# Altium PCB PCB1.PcbDoc (part 2 of 3)
Units mil, origin at the board's own origin, x right, y up, seen from the top; angles counter-clockwise.
Board outline 3937.01 x 3937.01 mil, 4 copper layers (L1, L2, L3, L4), stack 61.822 mil thick; 181 components, 235 nets, 1103 pads, 422 vias.
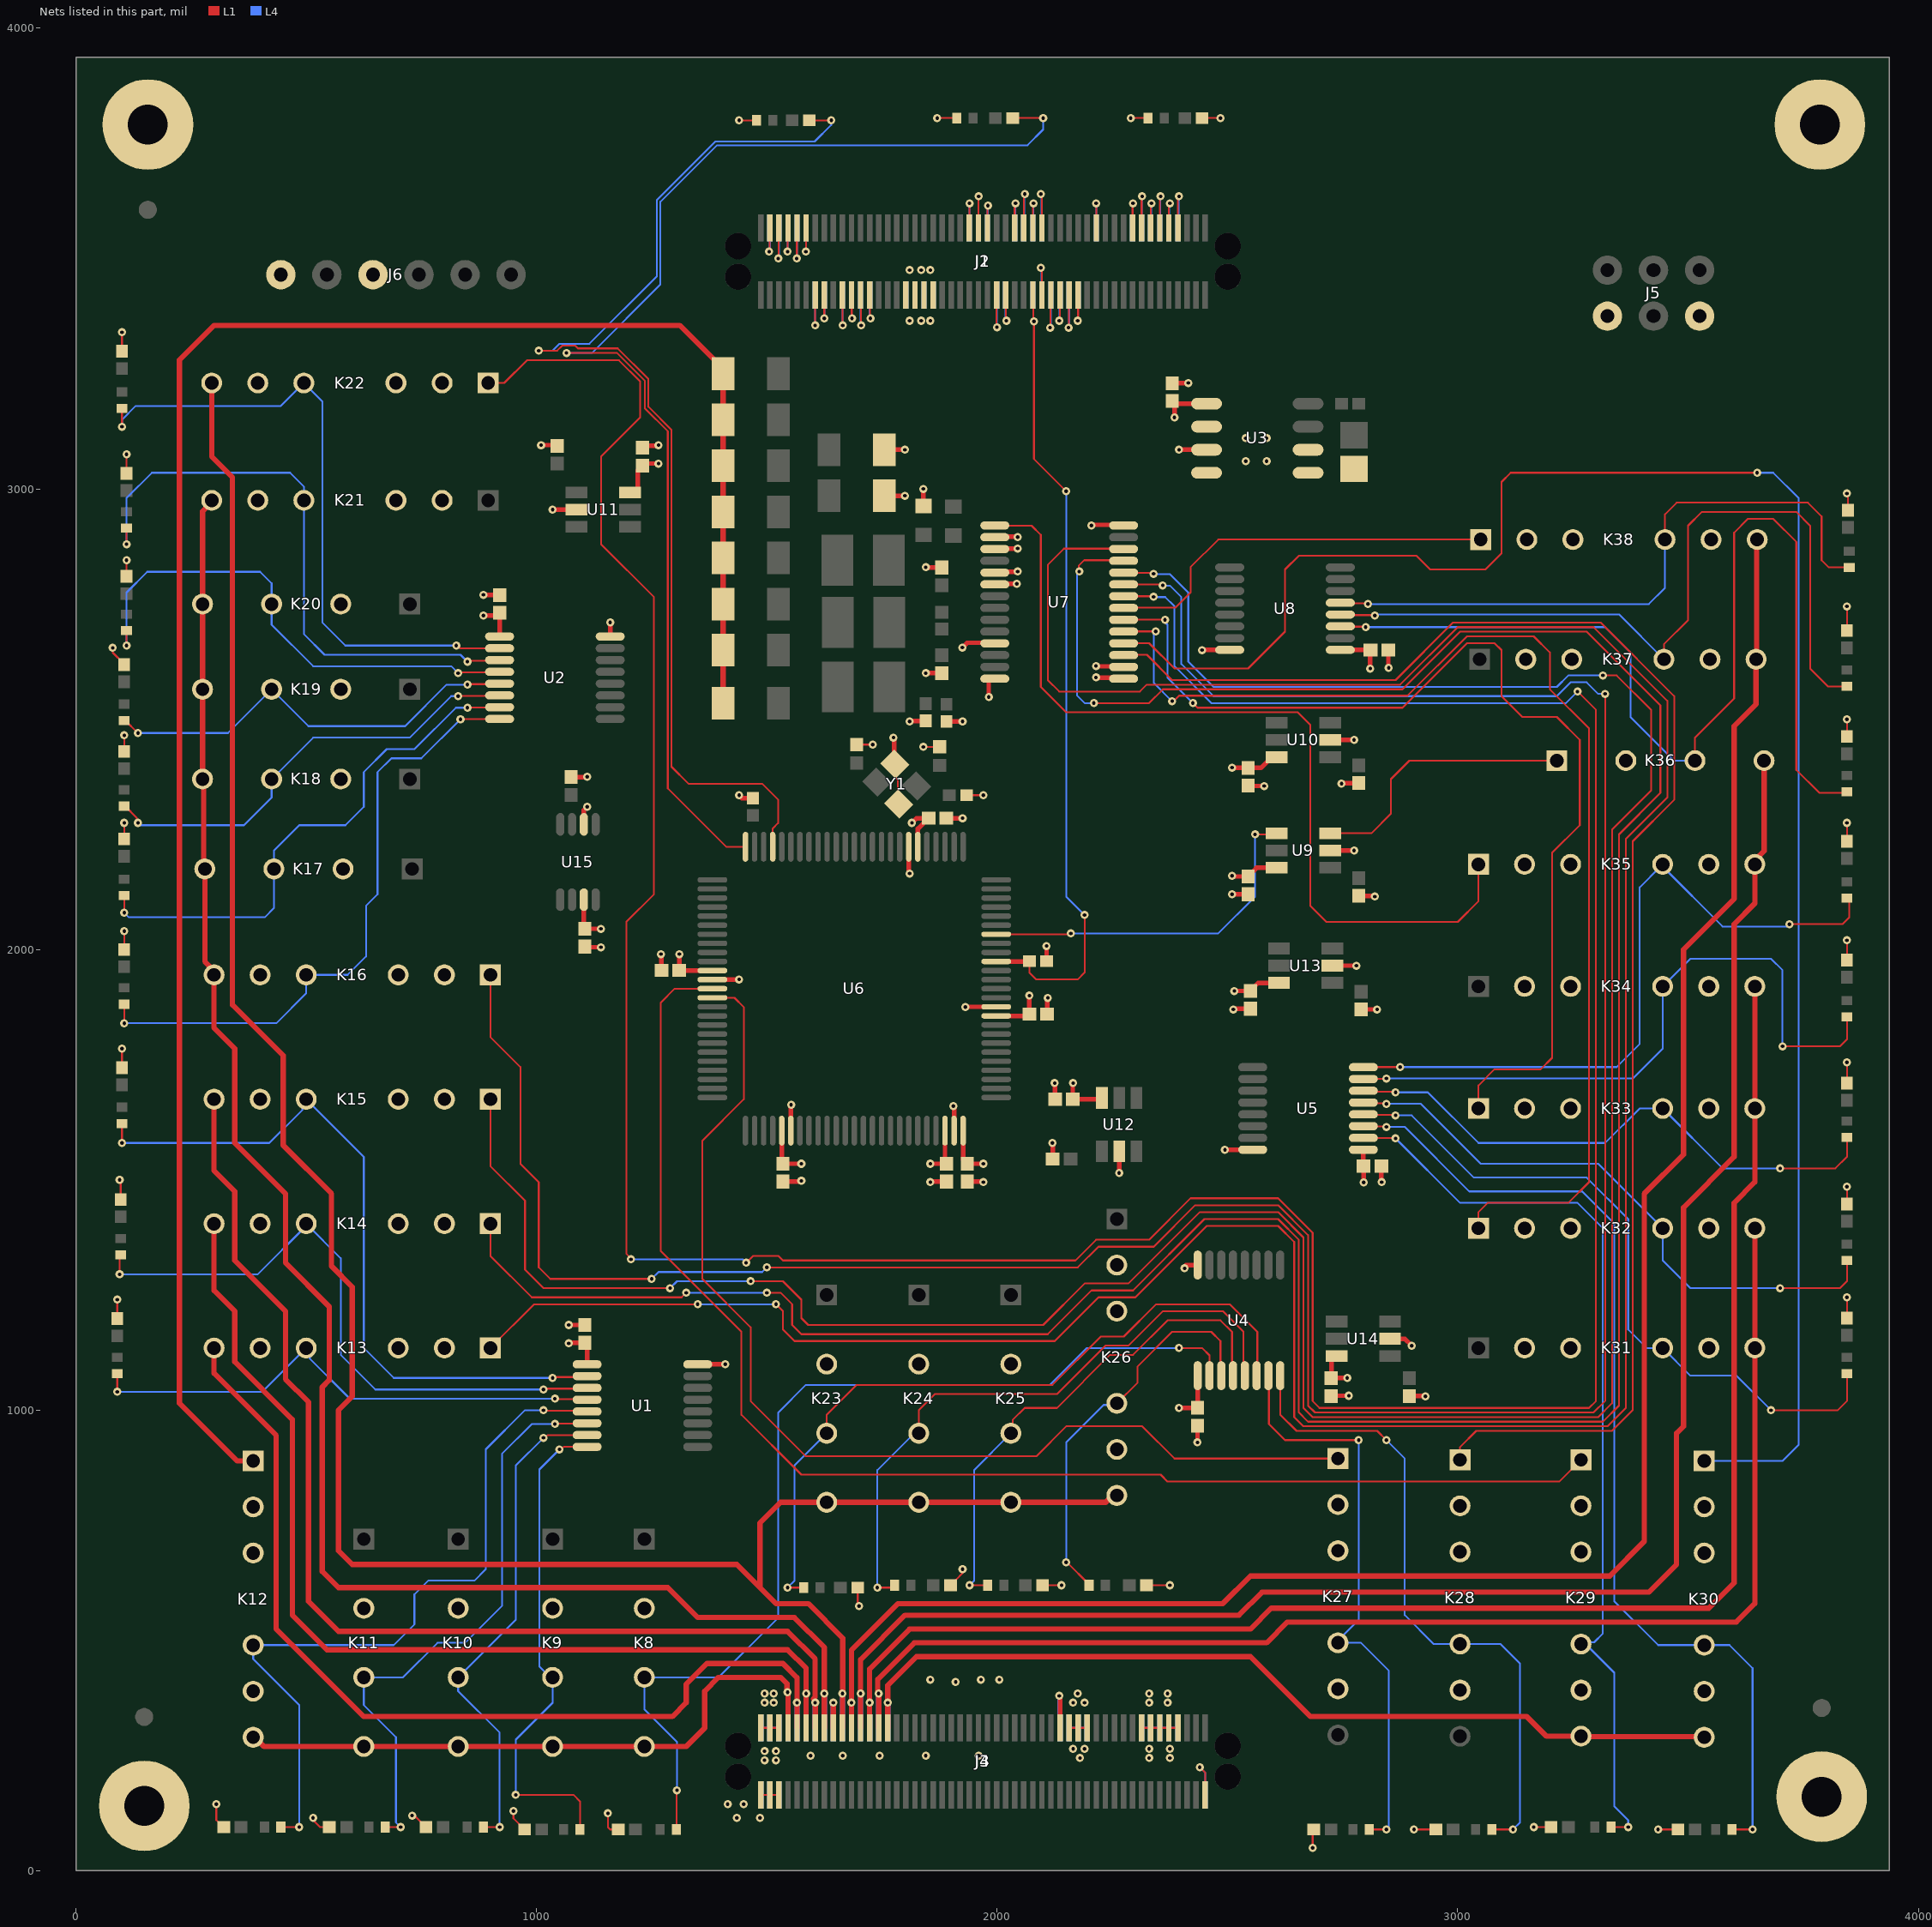
[diagram p4: the nets of this part, all layers, seen from the top]

## Via types
v1: diameter 17.72, hole 7.87, L1 to L4, 422 vias

## Nets (pads, with @x,y where several pads share a name; then routed paths per layer and width w, separated by ;. In a path a pad name is that pad's centre, name@x,y a point inside that pad or via, vN(x,y) a via of type N, cw(c..) or ccw(c..) an arc to the next point about the centre after c; other vN are vias at no path point) (continued)
+5V: C1.2 C2.2 C3.2 C4.2 C5.2 C6.2 C7.2 C8.2 C9.2 C11.2 C12.2 C13.2 C17.2 C18.2 C21.2 C22.2 C27.2 C28.2 C31.2 J3.1 J3.3 J3.5 J4.2 J4.4 J4.6 J5.2 J6.1 K8.2 K9.2 K10.2 K11.2 K12.2 K13.2 K14.2 K15.2 K16.2 K17.2 K18.2 K19.2 K20.2 K21.2 K22.2 K23.2 K24.2 K25.2 K26.2 K27.2 K28.2 K29.2 K30.2 K31.2 K32.2 K33.2 K34.2 K35.2 K36.2 K37.2 K38.2 R2.2 R9.1 R10.1 R11.1 R12.1 R13.1 R14.1 R15.1 R16.1 R17.1 R18.1 R19.1 R20.1 R21.1 R22.1 R23.1 R24.1 R25.1 R26.1 R27.1 R28.1 R29.1 R30.1 R31.1 R32.1 R33.1 R34.1 R35.1 R36.1 R37.1 R38.1 R39.1 R40.2 R49.1 U1.9 U2.9 U3.1 U3.3 U4.9 U5.9 U6.10 U6.31 U6.61 U6.80 U6.98 U6.100 U8.9 U9.6 U10.6 U11.6 U12.6 U13.6 U14.6 U15.7 | length 3536
  L1 w4: v1(80,2655) 80,2644.69 105,2619.69 R33.1@105,2618.7 ; R26.1@90,1198.7 v1(90,1240) ; v1(95,1500) 97.32,1497.68 R21.1@97.32,1457.4 ; R36.1@100,1743.7 v1(100,1785) ; R27.1@100,3298.7 v1(100,3340) ; R32.1@105,2000 v1(105,2040) ; R28.1@105,2240 v1(105,2275) ; R34.1@105,2430 v1(105,2465) ; R49.1@110,2810 v1(110,2845) ; R10.1@110,3033.7 v1(110,3075) ; v1(305,145) 305,110.31 320.31,95 R31.1@321.3,95 ; v1(515,115) 515,110 530,95 R17.1@550.31,95 ; v1(730,120) 735,120 R16.1@760,95 ; C2.2@914.29,2725 919.92,2730.63 C2.2@920,2730.71 ; v1(950,130) 950,114.02 962.24,101.78 962.24,100.8 973.03,90 R23.1@974.01,90 ; v1(1070,1145) v1@1071.42,1146.42 ; C31.2@1102.8,2047.2 C31.2@1105,2045 ; v1(1155,125) 1155,95 1160,90 R24.1@1177.6,90 ; C5.2@1310,1955 C5.2@1310.63,1954.37 ; J3.1@1486.97,310.51 J3.3@1506.65,310.51 J3.5@1526.34,310.51 ; C4.2@1532.52,1537.48 C4.2@1535,1535 ; R38.1@1697.4,615 1697.4,582.6 1700,580 v1(1700,575) ; C9.2@1850.63,2285 C9.2@1851.42,2285 ; C6.2@1886.85,1538.15 C6.2@1890,1535 ; R39.1@1898.7,620 1899.69,620 1910.48,630.8 1910.48,631.78 1925,646.3 v1(1925,655) ; C7.2@1926.22,1543.78 C7.2@1935,1535 ; R2.2@1933.7,2335 v1(1970,2335) ; C8.2@2065.94,1855.94 C8.2@2070,1860 ; R29.1@2098.7,620 v1(2140,620) ; v1@2164.29,1709.29 v1(2165,1710) ; U12.6@2224.53,1675 U12.6@2227.6,1678.07 ; R13.1@2324.57,620 v1(2375,620) ; C3.2@2380,3190.71 2385,3185.71 C3.2@2385.71,3185 ; C11.2@2435,1005 C11.2@2435.43,1005.43 ; R9.1@2445,3805 v1(2485,3805) ; v1(2510,2160) v1@2511.42,2158.58 ; v1(2510,2395) v1@2510.71,2394.29 ; C27.2@2545,2158.58 C27.2@2545,2159.37 ; C18.2@2550,1910 C18.2@2550,1910.79 ; U10.6@2596.1,2417.6 U10.6@2606.93,2417.6 ; v1(2685,50) 2685,87.4 R19.1@2687.6,90 ; U14.6@2726.1,1117.6 U14.6@2736.93,1117.6 ; C12.2@2795.08,1530.63 C12.2@2795.71,1530 ; C13.2@2810,2649.29 C13.2@2810.71,2650 C13.2@2810.28,2650.43 ; v1(2905,90) R18.1@2952.6,90 ; v1(3165,95) R22.1@3202.6,95 ; v1(3435,90) R25.1@3478.03,90 ; R15.1@3845,1200 v1(3845,1245) ; R30.1@3845,1447.4 v1(3845,1485) ; R35.1@3845,1710 v1(3845,1755) ; R12.1@3845,1977.4 v1(3845,2020) ; R37.1@3845,2235 v1(3845,2275) ; R14.1@3845,2462.4 v1(3845,2500) ; R11.1@3845,2692.4 v1(3845,2745) ; v1(3845,2990) 3847.32,2987.68 R20.1@3847.32,2953.7
  L1 w10: v1(885,2725) C2.2@914.29,2725 ; U2.9@919.92,2679.57 C2.2@919.92,2730.63 ; v1@1071.42,1146.42 C1.2@1105,1146.42 1110,1141.42 1110,1099.65 U1.9@1109.92,1099.57 ; C31.2@1102.8,2047.2 U15.7@1102.8,2108.31 ; C31.2@1105,2045 v1(1140,2045) ; U11.6@1203.07,2992.4 1211.87,2992.4 1219.66,3000.2 1219.66,3039.89 1225.52,3045.75 1230.83,3045.75 1240,3054.92 C21.2@1240,3055.71 ; 1245,3055 v1(1265,3055) ; C5.2@1310,1955 v1(1310,1990) ; C5.2@1310.63,1954.37 U6.61@1381.93,1954.37 ; C4.2@1532.52,1537.48 U6.80@1532.52,1606.93 ; C4.2@1535,1535 v1(1575,1535) ; v1(1815,2275) 1825,2285 1850.63,2285 1827.8,2262.17 U6.31@1827.8,2223.07 ; v1(1855,1535) C6.2@1890,1535 ; C6.2@1886.85,1538.15 U6.98@1886.85,1606.93 ; R40.2@1890,2495 v1(1925,2495) ; C7.2@1926.22,1543.78 U6.100@1926.22,1606.93 ; C7.2@1935,1535 v1(1970,1535) ; U6.10@1998.07,1855.94 C8.2@2065.94,1855.94 ; C8.2@2070,1860 v1(2070,1900) ; v1@2164.29,1709.29 C22.2@2164.29,1675 U12.6@2224.53,1675 ; v1(2385,3155) C3.2@2385,3185.71 ; C3.2@2385.71,3185 U3.1@2454.76,3185 ; v1(2395,1005) C11.2@2435,1005 ; v1(2395,3085) U3.3@2454.76,3085 ; C11.2@2435.43,1005.43 U4.9@2435.43,1074.92 ; v1@2510.71,2394.29 C28.2@2545,2394.29 2572.8,2394.29 U10.6@2596.1,2417.6 ; v1@2511.42,2158.58 C27.2@2545,2158.58 ; v1(2515,1910) C18.2@2550,1910 ; C27.2@2545,2159.37 2563.23,2177.6 U9.6@2606.93,2177.6 ; C18.2@2550,1910.79 2566.81,1927.6 U13.6@2611.93,1927.6 ; U14.6@2726.1,1117.6 2726.1,1071.1 2725,1070 v1(2760,1070) ; U8.9@2745.08,2650.43 C13.2@2810.28,2650.43 ; C12.2@2795.08,1530.63 U5.9@2795.08,1565.43 ; v1(2795.71,1494.29) C12.2@2795.71,1530 ; v1(2810,2610) C13.2@2810,2649.29
  L4 w4: J4.2@1486.97,310.51 J4.4@1506.65,310.51 J4.6@1526.34,310.51
  other v1: 1495,240 1520,240 1495,260 1520,260 1495,365 1515,365 1495,385 1515,385
+5V_EN: J1.62 J2.61 R6.2 U6.16 | length 1805.1
  L1 w4: R6.2@2069.06,1974.06 R6.2@2070,1975 2070,1950 2085,1935 2175,1935 2190,1950 v1(2190,2075) ; J1.62@2077.52,3420.75 2078.76,3419.51 2078.76,3364.95 v1(2080,3363.71) 2080,3065 v1(2150,2995)
  L1 w10: U6.16@1998.07,1974.06 R6.2@2069.06,1974.06
  L4 w4: J2.61@2077.52,3420.75 2078.76,3419.51 2078.76,3364.95 v1(2080,3363.71) ; v1(2150,2995) 2150,2115 v1(2190,2075)
A: J3.7 J4.8 K8.4 K9.4 K10.4 K11.4 K12.4 | length 1456.3
  L1 w11.55: K12.4@385,290 388.63,290 408.63,270 K10.4@830,270 K9.4@1035,270 K8.4@1234.02,270 1325,270 1365,310 1365,390 1395,420 1530,420 1543.82,406.18 1543.82,389.13 1546.02,386.93 J3.7@1546.02,310.51
  L4 w11.55: v1(1545,387.95) 1545.89,387.06 1545.89,310.64 J4.8@1546.02,310.51
A1: K12.1 R41.2 R42.2 R43.2 R44.2 R45.2 R46.2 R47.2 R48.2 | length 4452.7
  L1 w4: R44.2@1405,2850 R44.2@1405,2850 R44.2@1405,2850 ; R46.2@1405,3050 R46.2@1405,3050 ; R47.2@1404.96,3150 R47.2@1404.96,3150 ; R48.2@1404.96,3250 R48.2@1404.96,3260.83
  L1 w11.55: K12.1@385,890 350,890 225,1015 225,3280 300,3355 1310.79,3355 R48.2@1404.96,3260.83 ; R41.2@1404.96,2535 R42.2@1404.96,2650 R43.2@1404.96,2750 R44.2@1405,2850 ; R44.2@1405,2850 R45.2@1404.96,2950 R46.2@1405,3050 ; R47.2@1404.96,3150 R48.2@1404.96,3250 ; R46.2@1405,3050 R47.2@1404.96,3150
ADDR: J1.56 J2.55 | length 112.8
  L1 w4: J1.56@2018.46,3420.75 2019.23,3419.98 2019.23,3365.77 v1(2020,3365)
  L4 w4: J2.55@2018.46,3420.75 2018.46,3366.54 v1(2020,3365)
ALARM: R7.1 U6.47 | length 2497.9
  L1 w4: v1(1005,3300) 1045,3300 1055.86,3310.86 1084.14,3310.86 1090,3305 1176.31,3305 1243,3238.31 1243,3178.31 1293,3128.31 1293,2397 1330,2360 1490,2360 1524.52,2325.48 1524.52,2274.52 1512.83,2262.83 U6.47@1512.83,2223.07 ; R7.1@1590,3800 R7.1@1592.4,3800 v1(1640,3800)
  L4 w4: v1(1005,3300) 1035,3300 1050,3315 1115,3315 1261,3461 1261,3626.51 1388.49,3754 1604,3754 1640,3790 v1(1640,3800)
ALERT: J1.54 J2.53 | length 140.4
  L1 w4: J1.54@1998.78,3420.75 1998.78,3351.62 v1(1999.54,3350.86)
  L4 w4: J2.53@1998.78,3420.75 1999.16,3420.37 1999.16,3351.24 v1(1999.54,3350.86)
B: J3.9 J4.10 K13.4 | length 2171.9
  L1 w11.55: K13.4@300,1135 300,1080 435,945 435,525 ; 470,490 435,525 ; J3.9@1565.71,310.51 1565.71,364.29 1565.66,364.34 v1(1565.66,365) 1565.66,419.34 1535,450 1370,450 1325,405 1325,365 1295,335 625,335 435,525
  L4 w11.55: J4.10@1565.71,310.51 v1(1565.66,365)
C: J3.11 J4.12 K14.4 | length 2287.2
  L1 w11.55: K14.4@300,1405 300,1260 345,1215 345,1105 470,980 470,555 545,480 1545,480 1585.29,439.71 v1(1585.29,385) 1585.39,384.9 J3.11@1585.39,310.51
  L4 w11.55: v1(1585.29,385) 1585.29,310.62 J4.12@1585.39,310.51
CLK_IN: K35.1 U7.15 | length 1938.2
  L1 w4: U7.15@1985,2920 2075,2920 2095,2900 2095,2570 2150,2515 2652.66,2515 2680,2487.66 2680,2095 2715,2060 3000,2060 3045,2105 K35.1@3045,2185
COIL8: D18.1 K8.3 U4.10 | length 2194.4
  L1 w4: D18.1@1303.92,90 1303.92,173.92 v1(1305,175) ; v1(2395,1135) 2445,1135 2461.02,1118.98 U4.10@2461.02,1074.92
  L4 w4: v1(1305,175) 1305,280 1234.02,350.99 K8.3@1234.02,420 1395,420 1525,550 1525,995 1585,1055 2115,1055 2195,1135 v1(2395,1135)
COIL9: D17.1 K9.3 U1.16 | length 1084.8
  L1 w4: v1(955,165) 1080,165 1095,150 1095,90.98 D17.1@1094.02,90 ; v1(1050,915) 1053.71,915 1059.14,920.43 U1.16@1109.92,920.43
  L4 w4: v1(955,165) 955,285 1035,365 K9.3@1035,420 1030,420 1006.36,443.64 1006.36,871.36 v1(1050,915)
COIL10: D10.1 K10.3 U1.15 | length 1097.2
  L1 w4: D10.1@885.02,95 v1(920,95) ; v1(1015,940) 1018.71,940 1024.74,946.02 U1.15@1109.92,946.02
  L4 w4: v1(920,95) 920,300 830,390 K10.3@830,420 840,420 840,430 955,545 955,880 v1(1015,940)
COIL11: D11.1 K11.3 U1.14 | length 1298.2
  L1 w4: D11.1@671.63,95 v1(705,95) ; v1(1040,970) 1040.81,970.81 1109.11,970.81 U1.14@1109.92,971.61
  L4 w4: v1(705,95) 695,105 695,290 625,360 K11.3@625,420 710,420 785,495 845,495 925,575 925,905 990,970 v1(1040,970)
COIL12: D25.1 K12.3 U1.13 | length 1604.1
  L1 w4: D25.1@445,95 v1(485,95) ; v1(1015,1000) 1016.4,998.6 1108.52,998.6 U1.13@1109.92,997.2
  L4 w4: v1(485,95) 485,360 385,460 K12.3@385,490 690,490 735,535 735,600 765,630 865,630 890,655 890,915 975,1000 v1(1015,1000)
COIL13: D20.1 K13.3 U1.12 | length 1154.1
  L1 w4: v1(90,1040) D20.1@90,1079.57 ; v1(1040,1025) 1041.1,1023.9 1108.82,1023.9 U1.12@1109.92,1022.8
  L4 w4: v1(90,1040) 405,1040 K13.3@500,1135 507.9,1127.1 507.9,1112.1 595,1025 v1(1040,1025)
COIL14: D15.1 K14.3 U1.11 | length 1380.3
  L1 w4: v1(95,1295) 95,1335.06 D15.1@97.32,1337.38 ; v1(1015,1045) 1016.69,1046.69 1108.23,1046.69 U1.11@1109.92,1048.39
  L4 w4: v1(95,1295) 395,1295 500,1400 K14.3@500,1405 575,1330 575,1120 650,1045 v1(1015,1045)
COIL15: D30.1 K15.3 U1.10 | length 1595.8
  L1 w4: v1(100,1580) D30.1@100,1622.38 ; v1(1035,1070) 1036.99,1071.99 1107.93,1071.99 U1.10@1109.92,1073.98
  L4 w4: v1(100,1580) 420,1580 492.1,1652.1 492.1,1667.1 K15.3@500,1675 625,1550 625,1135 690,1070 v1(1035,1070)
COIL16: D26.1 K16.3 U2.16 | length 1372.9
  L1 w4: v1(105,1840) D26.1@105,1881.3 ; v1(835,2500) 835.22,2500.22 919.7,2500.22 U2.16@919.92,2500.43
  L4 w4: v1(105,1840) 435,1840 500,1905 K16.3@500,1945 590,1945 630,1985 630,2095 655,2120 655,2385 685,2415 750,2415 v1(835,2500)
COIL17: D22.1 K17.3 U2.15 | length 1162.5
  L1 w4: v1(105,2080) D22.1@105,2117.38 ; v1(850,2525) 850.51,2525.51 919.41,2525.51 U2.15@919.92,2526.02
  L4 w4: v1(105,2080) 115,2070 410,2070 430,2090 K17.3@430,2175 430,2215 485,2270 585,2270 625,2310 625,2385 675,2435 735,2435 825,2525 v1(850,2525)
COIL18: D28.1 K18.3 U2.14 | length 982.8
  L1 w4: D28.1@105,2311.3 106.97,2311.3 132.38,2285.89 132.38,2277.62 v1(135,2275) ; v1(830,2550) 830.81,2550.81 919.11,2550.81 U2.14@919.92,2551.61
  L4 w4: v1(135,2275) 140,2270 365,2270 425,2330 K18.3@425,2370 425,2380 435,2380 515,2460 725,2460 815,2550 v1(830,2550)
COIL19: D27.1 K19.3 U2.13 | length 936.9
  L1 w4: D27.1@105,2497.38 106.97,2497.38 134.35,2470 v1(135,2470) ; v1(850,2575) 851.1,2576.1 918.82,2576.1 U2.13@919.92,2577.2
  L4 w4: v1(135,2470) 330,2470 K19.3@425,2565 505,2485 715,2485 805,2575 v1(850,2575)
COIL20: D34.1 K20.3 U2.12 | length 1120.9
  L1 w4: v1(110,2660) D34.1@110,2692.38 ; v1(830,2600) 831.4,2601.4 918.52,2601.4 U2.12@919.92,2602.8
  L4 w4: v1(110,2660) 110,2775 155,2820 400,2820 425,2795 K20.3@425,2750 425,2705 515,2615 815,2615 v1(830,2600)
COIL21: D4.1 K21.3 U2.11 | length 1326.4
  L1 w4: v1(110,2880) D4.1@110,2915 ; v1(850,2625) 851.69,2626.69 918.23,2626.69 U2.11@919.92,2628.39
  L4 w4: v1(110,2880) 110,2980 165,3035 465,3035 495,3005 K21.3@495,2975 495,2685 540,2640 835,2640 v1(850,2625)
COIL22: D21.1 K22.3 U2.10 | length 1427.8
  L1 w4: v1(100,3135) D21.1@100,3175 ; v1(825.86,2660) 828.71,2660 834.74,2653.98 U2.10@919.92,2653.98
  L4 w4: v1(100,3135) 100,3150 130,3180 445,3180 K22.3@495,3230 535,3190 535,2710 585,2660 v1(825.86,2660)
COIL23: D32.1 K23.3 U4.14 | length 1600.2
  L1 w4: v1(1545,615) D32.1@1580,615 ; K23.3@1630,950 1630,990 1695,1055 2120,1055 2225,1160 2275,1160 2345,1230 2505,1230 2565,1170 2565,1076.54 U4.14@2563.39,1074.92
  L4 w4: v1(1545,615) 1560,630 1560,880 K23.3@1630,950
COIL24: D33.1 K24.3 U4.13 | length 1376.5
  L1 w4: v1(1740,615) 1772.38,615 D33.1@1777.38,620 ; K24.3@1830,950 1830,1000 1865,1035 2130,1035 2235,1140 2285,1140 2360,1215 2490,1215 2535,1170 2535,1106.76 2535.17,1106.59 2535.17,1077.55 U4.13@2537.8,1074.92
  L4 w4: v1(1740,615) 1740,870 1820,950 K24.3@1830,950
COIL25: D23.1 K25.3 U4.12 | length 1108.4
  L1 w4: v1(1940,620) D23.1@1979.57,620 ; K25.3@2030,950 2033.64,953.64 2033.64,978.64 2060,1005 2130,1005 2245,1120 2295,1120 2370,1195 2485,1195 2510,1170 U4.12@2510,1074.92
  L4 w4: v1(1940,620) 1950,630 1950,870 K25.3@2030,950
COIL26: D7.1 K26.3 U4.11 | length 869.7
  L1 w4: v1(2150,670) 2151.54,670 2199.57,621.97 D7.1@2199.57,620 ; K26.3@2260,1015 2305,1060 2305,1095 2380,1170 2465,1170 2485,1150 U4.11@2485,1074.92
  L4 w4: v1(2150,670) 2150,930 2231.36,1011.36 2256.36,1011.36 K26.3@2260,1015
COIL27: D13.1 K27.3 U4.15 | length 1304
  L1 w4: U4.15@2590,1085 2590,970 2625,935 v1(2785,935) ; D13.1@2807.62,90 v1(2845,90)
  L4 w4: v1(2785,935) 2785,545 2740,500 K27.3@2740,495 2790,495 2850,435 2850,92.34 2847.66,90 v1(2845,90)
COIL28: D12.1 K28.3 U4.16 | length 1440.2
  L1 w4: U4.16@2614.57,1074.92 2614.57,990.43 2650,955 2825,955 v1(2845,935) ; D12.1@3073.92,90 v1(3120,90)
  L4 w4: v1(2845,935) 2885,895 2885,555 2947.68,492.32 K28.3@3005,492.32 3092.68,492.32 3135,450 3135,105 v1(3120,90)
COIL29: D16.1 K29.3 U5.10 | length 2020.9
  L1 w4: U5.10@2795.08,1591.02 2795.59,1590.51 2864.49,1590.51 v1(2865,1590) ; D16.1@3332.62,95 v1(3370,95)
  L4 w4: v1(2865,1590) 3005,1450 3260,1450 3315,1395 3315,515 3296.24,496.24 3271.47,496.24 K29.3@3267.6,492.36 3277.64,492.36 3340,430 3340,140 3370,110 v1(3370,95)
COIL30: D19.1 K30.3 U5.11 | length 2207.2
  L1 w4: U5.11@2795.08,1616.61 2795.89,1615.81 2844.19,1615.81 v1(2845,1615) ; D19.1@3595.43,90 v1(3640,90)
  L4 w4: v1(2845,1615) 2885,1615 3025,1475 3270,1475 3340,1405 3340,585 3435,490 K30.3@3535,490 3590,490 3640,440 v1(3640,90)
COIL31: D9.1 K31.3 U5.12 | length 1524.4
  L1 w4: U5.12@2795.08,1642.2 2796.18,1641.1 2863.9,1641.1 v1(2865,1640) ; v1(3680,1000) 3825,1000 3845,1020 D9.1@3845,1079.57
  L4 w4: v1(2865,1640) 2900,1640 3035,1505 3280,1505 3370,1415 3370,1175 3410,1135 K31.3@3445,1135 3505,1075 3605,1075 v1(3680,1000)
COIL32: D24.1 K32.3 U5.13 | length 1309
  L1 w4: U5.13@2795.08,1667.8 2796.48,1666.4 2843.6,1666.4 v1(2845,1665) ; v1(3700,1265) 3830,1265 3845,1280 D24.1@3845,1325
  L4 w4: v1(2845,1665) 2920,1665 3050,1535 3305,1535 K32.3@3445,1395 3445,1325 3505,1265 v1(3700,1265)
COIL33: D29.1 K33.3 U5.14 | length 1234.5
  L1 w4: U5.14@2795.08,1693.39 2796.77,1691.69 2863.31,1691.69 v1(2865,1690) ; v1(3700,1525) 3820,1525 3845,1550 D29.1@3845,1592.38
  L4 w4: v1(2865,1690) 2935,1690 3045,1580 3320,1580 3395,1655 K33.3@3445,1655 3575,1525 v1(3700,1525)
COIL34: D6.1 K34.3 U5.15 | length 1467.4
  L1 w4: U5.15@2795.08,1718.98 2795.59,1719.49 2844.49,1719.49 v1(2845,1720) ; v1(3705,1790) 3830,1790 3845,1805 D6.1@3845,1853.7
  L4 w4: v1(2845,1720) 3380,1720 3445,1785 K34.3@3445,1920 3505,1980 3680,1980 3705,1955 v1(3705,1790)
COIL35: D31.1 K35.3 U5.16 | length 1552.2
  L1 w4: U5.16@2795.08,1744.57 2795.3,1744.78 2874.78,1744.78 v1(2875,1745) ; v1(3720,2055) 3835,2055 3850,2070 3850,2106.97 D31.1@3845,2111.97
  L4 w4: v1(2875,1745) 3345,1745 3395,1795 3395,2135 3440,2180 3440,2185 K35.3@3445,2185 3445,2180 3575,2050 3717.66,2050 3720,2052.34 v1(3720,2055)
COIL36: D8.1 K36.3 U8.11 | length 2297.8
  L1 w4: U8.11@2745.08,2701.61 2745.89,2700.81 2799.19,2700.81 v1(2800,2700) ; K36.3@3515,2410 3515,2460 3600,2545 3600,2905 3630,2935 3685,2935 3735,2885 3735,2390 3785,2340 3842.6,2340 D8.1@3845,2342.4
  L4 w4: v1(2800,2700) 3320,2700 3375,2645 3375,2505 3470,2410 K36.3@3515,2410
COIL37: D5.1 K37.3 U8.12 | length 1752.7
  L1 w4: U8.12@2745.08,2727.2 2746.18,2726.1 2818.9,2726.1 v1(2820,2725) ; K37.3@3447.68,2630 3447.68,2662.68 3500,2715 3500,2920 3530,2950 3735,2950 3765,2920 3765,2610 3803.92,2571.08 D5.1@3845,2571.08
  L4 w4: v1(2820,2725) 2822.68,2727.68 3350,2727.68 K37.3@3447.68,2630
COIL38: D14.1 K38.3 U8.13 | length 1404.8
  L1 w4: U8.13@2745.08,2752.8 2746.48,2751.4 2803.6,2751.4 v1(2805,2750) ; K38.3@3450,2890 3450,2945 3475,2970 3760,2970 3790,2940 3790,2845 3805.43,2829.57 D14.1@3850,2829.57
  L4 w4: v1(2805,2750) 3415,2750 3450,2785 K38.3@3450,2890
COM: J3.67 J4.68 | length 140.3
  L1 w4: v1(2135,380) v1@2136.57,378.43
  L1 w10: J3.67@2136.57,310.51 v1@2136.57,378.43
  L4 w4: v1(2135,380) v1@2135.79,379.21 ; J4.68@2135.79,311.3 J4.68@2136.57,310.51
  L4 w10: J4.68@2135.79,311.3 v1@2135.79,379.21
CS: U6.19 U9.4 | length 778.8
  L1 w4: U6.19@1998.07,2033.11 2158.11,2033.11 v1(2160,2035) ; v1(2560,2250) 2604.53,2250 U9.4@2606.93,2252.4
  L4 w4: v1(2160,2035) 2480,2035 2560,2115 v1(2560,2250)
CS_MASTER: J3.100 J4.99 | length 129.9
  L1 w4: v1(2440,225) 2451.54,213.46 J3.100@2451.54,164.84
  L4 w4: v1(2440,225) 2451.54,213.46 J4.99@2451.54,164.84
CS_RASP: K36.1 U9.3 | length 601.1
  L1 w4: U9.3@2723.07,2252.4 2812.4,2252.4 2855,2295 2855,2370 2895,2410 K36.1@3215,2410
D: J3.13 J4.14 K15.4 | length 2523.6
  L1 w11.55: K15.4@300,1675 300,1520 345,1475 345,1325 455,1215 455,1067.5 505,1017.5 505,585 570,520 1545,520 1604.92,460.08 1604.92,376.87 1601.53,373.47 ; v1(1605.03,365) 1605.08,364.92 J3.13@1605.08,310.51
  L4 w11.55: J4.14@1605.08,310.51 v1@1605.05,364.97
D0: K28.1 U7.3 | length 3371.1
  L1 w4: U7.3@2262.72,2639.84 2325.16,2639.84 2380,2585 2865,2585 2990,2710 3310,2710 3470,2550 3470,2325 3380,2235 3380,1000 3335,955 3040,955 3005,920 K28.1@3005,892.32
D1: K30.1 U7.4 | length 4168.3
  L1 w4: U7.4@2263.15,2665 2330,2665 2385,2610 2545,2610 2625,2690 2625,2825 2655,2855 2910,2855 2940,2825 3060,2825 3095,2860 3095,3015 3115,3035 v1(3650,3035) ; U7.4@2267.24,2666.02 U7.4@2267.68,2665.59
  L4 w4: K30.1@3535,890 3705,890 3740,925 3740,2980 3685,3035 v1(3650,3035)
D2: K32.1 U7.5 | length 2625.1
  L1 w4: U7.5@2267.24,2691.61 2268.27,2690.59 v1(2344.53,2690.59) ; v1(2380,2539.14) 2383.34,2539.14 2395.06,2550.86 2890.86,2550.86 3020,2680 3165,2680 3200,2645 3200,2565 3285,2480 3285,1495 3240,1450 3065,1450 3045,1430 K32.1@3045,1395
  L4 w4: v1@2340,2690 2340,2579.14 v1(2380,2539.14)
D3: K33.1 U7.6 | length 2302.3
  L1 w4: U7.6@2267.24,2717.2 2268.05,2716.4 2363.72,2716.4 v1(2364.53,2715.59) ; v1(2425,2535) 2435,2525 2880,2525 3020,2665 3080,2665 3095,2650 3095,2550 3140,2505 3215,2505 3265,2455 3265,2270 3205,2210 3205,1765 3180,1740 3080,1740 3045,1705 K33.1@3045,1655
  L4 w4: v1@2360,2715 2370,2705 2370,2590 v1(2425,2535)
D4: K38.1 U7.7 | length 880.7
  L1 w4: U7.7@2262.72,2742.2 2387.2,2742.2 2420,2775 2420,2830 2480,2890 K38.1@3050,2890
D5: K22.1 U7.8 | length 7696.6
  L1 w4: K22.1@895,3230 930,3230 979.14,3279.14 1179.14,3279.14 1225,3233.29 1225,3155 1140,3070 1140,2880 1255,2765 1255,2120 1195,2060 1195,1340 1205,1330 v1(1205,1327.5) ; v1(1455,1320) 1470,1335 1525,1335 1535,1325 2170,1325 2215,1370 2330,1370 2420,1460 2610,1460 2685,1385 2685,1020 2700,1005 3285,1005 3300,1020 3300,2520 v1(3260,2560) ; U7.8@2267.24,2768.39 2268.64,2766.99 2338.13,2766.99 v1(2339.53,2765.59)
  L4 w4: v1(1205,1327.5) 1447.5,1327.5 v1(1455,1320) ; v1@2335,2765 2365,2765 2385,2745 2385,2615 2465,2535 3235,2535 v1(3260,2560)
D6: K16.1 U7.9 | length 6284.4
  L1 w4: K16.1@900,1945 900,1810 965,1745 965,1535 1005,1495 1005,1310 1030,1285 v1(1250,1285) ; v1(1500,1310) 2175,1310 2220,1355 2340,1355 2430,1445 2610,1445 2675,1380 2675,1010 2690,995 3295,995 3320,1020 v1(3320,2555) ; U7.9@2267.24,2793.98 2268.94,2792.28 2357.83,2792.28 v1(2359.53,2790.59)
  L4 w4: v1(1250,1285) 1265,1300 1490,1300 v1(1500,1310) ; v1@2355,2790 2375,2790 2400,2765 2400,2620 2470,2550 3215,2550 3245,2580 3280,2580 3305,2555 v1(3320,2555)
D7: K15.1 U7.10 | length 6291.5
  L1 w4: K15.1@900,1675 900,1530 975,1455 975,1305 1015,1265 v1(1290,1265) ; v1(1465,1280) 1535,1280 1575,1240 1575,1200 1590,1185 2100,1185 2190,1275 2285,1275 2440,1430 2610,1430 2665,1375 2665,1005 2685,985 3305,985 3335,1015 3335,2260 3420,2345 3420,2520 3345,2595 v1(3315,2595) ; U7.10@2267.24,2819.57 2269.23,2817.58 2337.54,2817.58 v1(2339.53,2815.59)
  L4 w4: v1(1290,1265) 1305,1280 v1(1465,1280) ; v1@2335,2815 2375,2815 2415,2775 2415,2625 2470,2570 3215,2570 3240,2595 v1(3315,2595)
D8: K14.1 U7.11 | length 6482.7
  L1 w4: K14.1@900,1405 900,1335 990,1245 1315,1245 v1(1325,1255) ; v1(1500,1255) 1530,1255 1555,1230 1555,1185 1575,1165 2110,1165 2205,1260 2295,1260 2450,1415 2610,1415 2655,1370 2655,995 2675,975 3315,975 3350,1010 3350,2250 3440,2340 3440,2530 3280,2690 3005,2690 2920,2605 2880,2565 2360,2565 2330,2535 2220,2535 v1(2210,2535) ; v1(2178.39,2820.59) 2177.04,2821.93 2177.04,2833.11 2189.09,2845.16 U7.11@2267.24,2845.16
  L4 w4: v1(1325,1255) v1(1500,1255) ; v1@2173.86,2820 2173.86,2551.14 2190,2535 v1(2210,2535)
D9: K13.1 U7.12 | length 6553
  L1 w4: K13.1@900,1135 995,1230 v1(1350,1230) ; v1(1520,1230) 1535,1215 1535,1175 1560,1150 2125,1150 2220,1245 2300,1245 2455,1400 2610,1400 2645,1365 2645,985 2665,965 3325,965 3365,1005 3365,2240 3455,2330 3455,2540 3295,2700 3000,2700 2875,2575 2325,2575 2310,2560 2135,2560 2110,2585 2110,2835 2145.16,2870.16 U7.12@2262.72,2870.16
  L4 w4: v1(1350,1230) v1(1520,1230)
DATA: R8.1 U6.50 | length 2752.8
  L1 w4: v1(1065,3295) 1175,3295 1235,3235 1235,3175 1285,3125 1285,2350 1411.93,2223.07 U6.50@1453.78,2223.07 ; R8.1@2035,3805 v1(2100,3805)
  L4 w4: v1(1065,3295) 1120,3295 1269,3444 1269,3623.2 1391.8,3746 2066,3746 2100,3780 v1(2100,3805)
E: J3.15 J4.16 K16.4 K17.4 K18.4 K19.4 K20.4 K21.4 | length 3861.1
  L1 w11.55: K21.4@295,2975 295,2971.37 275,2951.37 K20.4@275,2750 K19.4@275,2565 K18.4@275,2370 277.5,2367.5 277.5,2177.5 K17.4@280,2175 280,1974.13 300,1954.13 K16.4@300,1945 300,1830 345,1785 345,1580 455,1470 455,1320 550,1225 550,1065 535,1050 535,650 570,615 1285,615 1350,550 1560,550 1624.76,485.24 v1@1624.76,384.76 ; J3.15@1624.76,310.51 v1@1624.76,384.76 ; v1(1625,385) v1@1624.76,384.76
  L4 w11.55: J4.16@1624.76,310.51 1624.87,310.62 1624.87,384.87 v1(1625,385)
EXT_RX: K27.1 U6.64 | length 2392.9
  L1 w4: U6.64@1381.93,1895.31 1429.69,1895.31 1450,1875 1450,1675 1360,1585 1360,1285 1465,1180 1465,1020 1585,900 2085,900 2150,965 2315,965 2385,895 K27.1@2740,895
EXT_TX: K29.1 U6.63 | length 2994.1
  L1 w4: U6.63@1381.93,1915 1300,1915 1270,1885 1270,1345 1445,1170 1445,990 1575,860 2355,860 2370,845 3220.24,845 K29.1@3267.6,892.36
F: J3.17 J4.18 | length 109
  L1 w11.55: J3.17@1644.45,310.51 1644.45,364.45 1644.5,364.5 v1(1644.5,365)
  L4 w11.55: J4.18@1644.47,310.54 v1(1644.5,365)
G: J3.19 J4.20 K22.4 K23.4 K24.4 K25.4 K26.4 | length 5057.2
  L1 w11.55: K22.4@295,3230 295,3070 340,3025 340,1880 450,1770 450,1575 555,1470 555,1312.5 600,1267.5 600,1030 570,1000 570,695 600,665 1435,665 1485,615 ; J3.19@1664.13,310.51 1664.26,310.64 1664.13,310.77 1664.13,384.13 v1@1665,385 ; v1(1664.19,385) 1665,385.81 1665,505 1590,580 1520,580 1485,615 ; K26.4@2260,815 2250.87,815 2235.87,800 K25.4@2030,800 K24.4@1830,800 K23.4@1630,800 1530,800 1485,755 1485,615
  L4 w11.55: J4.20@1664.13,310.51 1664.24,310.62 1664.24,384.95 v1(1664.19,385)
GND: C1.1 C2.1 C3.1 C4.1 C5.1 C6.1 C7.1 C8.1 C9.1 C10.1 C11.1 C12.1 C13.1 C15.1 C16.1 C17.1 C18.1 C19.1 C20.1 C21.1 C22.1 C23.1 C24.1 C25.1 C26.1 C27.1 C28.1 C29.1 C30.1 C31.1 C32.1 D1.1 D2.1 D3.1 J1.34 J1.36 J1.38 J1.40 J2.33 J2.35 J2.37 J2.39 J3.2 J3.4 J3.6 J3.69 J3.71 J3.73 J3.85 J3.87 J3.89 J3.91 J3.93 J4.1 J4.3 J4.5 J4.70 J4.72 J4.74 J4.86 J4.88 J4.90 J4.92 J4.94 J5.6 J6.3 K12.5 K12.6 K13.5 K13.6 K14.5 K14.6 K15.5 K15.6 K16.5 K16.6 K21.5 K21.6 K22.5 K22.6 K26.5 K26.6 K27.5 K27.6 K28.5 K28.6 K29.5 K29.6 K30.5 K30.6 K31.5 K31.6 K32.5 K32.6 K33.5 K33.6 K34.5 K34.6 K35.5 K35.6 K37.5 K37.6 K38.5 K38.6 MH1.1 MH2.1 MH3.1 MH4.1 R4.1 R5.1 R6.1 R50.1 R51.1 R52.1 U1.8 U2.8 U3.2 U3.4 U3.5 U3.6 U4.8 U5.8 U6.11 U6.32 U6.62 U6.81 U6.99 U7.1 U7.2 U7.14 U7.16 U7.17 U7.19 U7.20 U7.25 U7.28 U8.8 U9.2 U10.2 U11.2 U12.2 U13.2 U14.2 U15.2 Y1.2 Y1.4 | length 3242.3
  L1 w4: C2.1@919.29,2770 C2.1@920,2769.29 ; C24.1@1043.58,3095 C24.1@1045,3093.58 ; C31.1@1105,2006.42 C31.1@1106.42,2005 ; v1@1109.29,2374.29 v1(1110,2375) ; v1(1160,2710) v1@1160.08,2709.92 ; v1(1270,1990) v1@1271.42,1988.58 ; v1@1409.57,1099.57 v1(1410,1100) ; v1(1440,2335) 1446.3,2328.7 ; v1(1440,3800) D1.1@1477.38,3800 ; J3.2@1486.97,164.84 J3.4@1506.65,164.84 J3.6@1526.34,164.84 ; v1@1552.2,1662.2 v1(1552.8,1662.8) ; v1@1573.58,1496.42 v1(1575,1497.83) ; C26.1@1695,2445.08 1695.08,2445 v1(1730,2445) ; v1(1775,2460) v1@1776.28,2458.72 ; Y1.2@1776.28,2403.72 Y1.2@1777.67,2402.33 1777.67,2374.53 1784.63,2367.57 1784.63,2317.42 Y1.4@1786.03,2316.03 ; v1@1808.11,2166.89 v1(1810,2165) ; v1(1810,2495) v1@1811.3,2496.3 ; v1(1840,2440) 1875,2440 C25.1@1875,2440.08 ; v1(1845,2830) v1@1845.71,2829.29 ; v1(1855,1495) v1@1856.42,1496.42 ; v1(1870,3805) D2.1@1912.38,3805 ; v1(1905,1660) v1@1906.54,1658.46 ; v1(1931.26,1875) v1@1931.89,1875.63 ; v1@1968.58,1496.42 v1(1970,1495) ; U7.17@1995,2869.41 U7.17@1995.59,2870 ; v1@2043.78,2896.34 v1(2044.53,2895.59) ; v1@2043.94,2870 v1(2044.53,2870.59) v1@2044.37,2870.75 ; v1@2108.58,1893.58 v1(2110,1895) ; v1(2120,1580) v1@2120.71,1579.29 ; v1(2125,1710) v1@2125.71,1709.29 ; J3.69@2156.26,310.51 J3.71@2175.94,310.51 J3.73@2195.63,310.51 ; v1(2204.53,2920.59) v1@2205.87,2921.93 ; v1(2214.53,2590.59) v1@2215.2,2589.92 ; v1(2214.53,2615.59) v1@2215.28,2614.84 ; U7.1@2265.24,2589.92 2265.91,2590.59 U7.1@2267.24,2589.25 ; v1(2290,3805) D3.1@2327.38,3805 ; J3.85@2313.74,310.51 J3.87@2333.43,310.51 J3.89@2353.11,310.51 J3.91@2372.8,310.51 J3.93@2392.48,310.51 ; v1(2407.14,1308.01) 2409.77,1310.64 2409.77,1314.77 v1@2410,1315 ; v1@2414.29,3229.29 v1(2415,3230) ; v1(2445,2650) v1@2445.43,2650.43 ; v1(2512.83,1870) v1@2514.25,1871.42 ; C28.1@2545,2355.71 C28.1@2545.71,2355 ; v1(2747.83,2360) v1@2749.25,2361.42 ; v1@2818.58,2116.42 v1(2820,2115) ; v1@2834.29,1495.71 v1(2835,1495) ; v1@2849.29,2612.13 v1(2850,2611.42) ; v1@2929.29,1030.71 v1(2930,1030)
  L1 w10: v1(885,2770) C2.1@919.29,2770 ; v1(1010,3095) C24.1@1043.58,3095 ; v1(1035,2955) U11.2@1086.93,2955 ; v1(1070,1185) C1.1@1105,1185 ; C32.1@1075,2374.29 v1@1109.29,2374.29 ; U15.2@1102.8,2271.69 1102.8,2302.8 v1(1110,2310) ; C31.1@1106.42,2005 v1(1140,2005) ; U2.8@1160.08,2679.57 v1@1160.08,2709.92 ; 1245,3093.58 1263.58,3093.58 v1(1265,3095) ; C5.1@1271.42,1955 v1@1271.42,1988.58 ; U1.8@1350.08,1099.57 v1@1409.57,1099.57 ; U6.62@1381.93,1934.68 1439.68,1934.68 v1(1440,1935) ; 1446.3,2328.7 R5.1@1470,2328.7 ; C4.1@1535,1496.42 v1@1573.58,1496.42 ; U6.81@1552.2,1606.93 v1@1552.2,1662.2 ; R50.1@1755.08,2985 v1(1800,2985) ; R51.1@1755.08,3085 v1(1800,3085) ; Y1.2@1776.28,2403.72 v1@1776.28,2458.72 ; v1@1808.11,2166.89 U6.32@1808.11,2223.07 ; v1@1811.3,2496.3 R52.1@1845,2496.3 ; R4.1@1840,2962.99 v1(1840,3000) ; v1(1845,2600) C15.1@1880,2600 ; v1@1845.71,2829.29 C16.1@1880,2829.29 ; v1@1856.42,1496.42 C6.1@1890,1496.42 ; C9.1@1890,2285 v1(1925,2285) ; U6.99@1906.54,1606.93 v1@1906.54,1658.46 ; v1(1924.53,2655.59) 1934.96,2666.02 U7.25@1981.81,2666.02 ; v1@1931.89,1875.63 U6.11@1998.07,1875.63 ; C7.1@1935,1496.42 v1@1968.58,1496.42 ; v1(1981.81,2548.31) U7.28@1981.81,2589.25 ; U7.20@1981.81,2793.98 v1(2042.91,2793.98) ; U7.16@1981.81,2896.34 v1@2043.78,2896.34 ; U7.19@1995,2818.23 1996.48,2819.7 2024.57,2819.7 2025.02,2820.16 2044.09,2820.16 v1(2044.53,2820.59) ; U7.17@1995.59,2870 v1@2043.94,2870 ; R6.1@2107.4,1975 v1(2107.4,2007.6) ; C8.1@2108.58,1860 v1@2108.58,1893.58 ; C23.1@2120.71,1545 v1@2120.71,1579.29 ; C22.1@2125.71,1675 v1@2125.71,1709.29 ; v1@2205.87,2921.93 U7.14@2267.24,2921.93 ; v1@2215.2,2589.92 U7.1@2265.24,2589.92 ; v1@2215.28,2614.84 U7.2@2267.24,2614.84 ; v1(2265,1515) U12.2@2265,1561.93 ; C3.1@2380,3229.29 v1@2414.29,3229.29 ; v1@2410,1315 2410.08,1315.08 U4.8@2435.43,1315.08 ; v1(2435,930) C11.1@2435,966.42 ; v1@2445.43,2650.43 U8.8@2504.92,2650.43 ; v1(2494.57,1565.43) U5.8@2554.92,1565.43 ; v1(2510,2120) C27.1@2545,2120 ; v1@2514.25,1871.42 C18.1@2550,1871.42 ; C28.1@2545.71,2355 v1(2580,2355) ; U9.2@2723.07,2215 v1(2775,2215) ; U10.2@2723.07,2455 v1(2775,2455) ; U13.2@2728.07,1965 v1(2780,1965) ; C17.1@2738.58,1031.42 v1(2763.58,1031.42) ; v1@2749.25,2361.42 C29.1@2785,2361.42 ; C19.1@2785,2116.42 v1@2818.58,2116.42 ; C20.1@2790,1870 v1(2825,1870) ; v1@2834.29,1495.71 C12.1@2834.29,1530 ; v1@2849.29,2612.13 C13.1@2849.29,2650 ; U14.2@2853.07,1155 2885,1155 v1(2900,1140) ; C30.1@2895,1030.71 v1@2929.29,1030.71
  L4 w4: J4.1@1486.97,164.84 J4.3@1506.65,164.84 J4.5@1526.34,164.84 ; J4.70@2156.26,310.51 J4.72@2175.94,310.51 J4.74@2195.63,310.51 ; J4.86@2313.74,310.51 J4.88@2333.43,310.51 J4.90@2353.11,310.51 J4.92@2372.8,310.51 J4.94@2392.48,310.51
  other v1: 1435,115 1485,115 1415,145 1450,145 2180,245 2330,245 2375,245 1595,250 1665,250 1745,250 1845,250 1960,250 2165,265 2190,265 2330,265 2375,265 2165,365 2190,365 2330,365 2370,365 2175,385 2330,385 2370,385 1910,410 1855,415 1965,415 2005,415 2540,3060 2585,3060 2540,3110 2585,3110 1810,3365 1835,3365 1855,3365 1810,3475 1835,3475 1855,3475
GPIO7: J1.14 J2.13 | length 131.6
  L1 w4: v1(1605,3355) v1(1605,3355) 1605.04,3420.71 J1.14@1605.08,3420.75
  L4 w4: v1(1605,3355) 1605.08,3355.08 J2.13@1605.08,3420.75
GPIO8: J1.16 J2.15 | length 101.7
  L1 w4: J1.16@1624.76,3420.75 1624.88,3420.63 1624.88,3370.12 v1(1625,3370)
  L4 w4: J2.15@1624.76,3420.75 1624.88,3420.63 1624.88,3370.12 v1(1625,3370)
GPIO9: J1.64 J2.63 | length 120.3
  L1 w4: v1(2095,3480) 2097.2,3477.8 J1.64@2097.2,3420.75
  L4 w4: v1(2095,3480) 2096.1,3478.9 2096.1,3421.85 J2.63@2097.2,3420.75
GPIO10: J1.20 J2.19 | length 132.2
  L1 w4: J1.20@1664.13,3420.75 1664.57,3420.32 1664.57,3355.43 v1(1665,3355)
  L4 w4: J2.19@1664.13,3420.75 1664.13,3355.87 v1(1665,3355)
GPIO11: J1.22 J2.21 | length 102.5
  L1 w4: J1.22@1683.82,3420.75 1684.41,3420.16 1684.41,3370.59 v1(1685,3370)
  L4 w4: J2.21@1683.82,3420.75 1683.82,3371.18 v1(1685,3370)
GPIO12: J1.24 J2.23 | length 132.7
  L1 w4: J1.24@1703.5,3420.75 1704.25,3420 1704.25,3355.75 v1(1705,3355)
  L4 w4: J2.23@1703.5,3420.75 1703.5,3356.5 v1(1705,3355)
GPIO13: J1.26 J2.25 | length 103
  L1 w4: J1.26@1723.19,3420.75 1724.09,3419.84 1724.09,3370.91 v1(1725,3370)
  L4 w4: J2.25@1723.19,3420.75 1723.19,3371.81 v1(1725,3370)
GPIO15: J1.3 J2.4 | length 104.2
  L1 w4: v1(1505,3515) 1505.83,3515.83 1505.83,3565.59 J1.3@1506.65,3566.42
  L4 w4: v1(1505,3515) 1505,3520 1506.65,3521.65 J2.4@1506.65,3566.42
GPIO16: J1.5 J2.6 | length 133.9
  L1 w4: v1(1525,3500) 1525.67,3500.67 1525.67,3565.75 J1.5@1526.34,3566.42
  L4 w4: v1(1525,3500) 1526.34,3501.34 J2.6@1526.34,3566.42
GPIO17: J1.7 J2.8 | length 103.7
  L1 w4: v1(1545,3515) 1545,3565.39 J1.7@1546.02,3566.42
  L4 w4: v1(1545,3515) 1545.51,3515.51 1545.51,3565.91 J2.8@1546.02,3566.42
GPIO18: J1.9 J2.10 | length 133.4
  L1 w4: v1(1565,3500) 1565.35,3500.35 1565.35,3566.06 J1.9@1565.71,3566.42
  L4 w4: v1(1565,3500) 1565.35,3500.35 1565.35,3566.06 J2.10@1565.71,3566.42
GPIO19: J1.11 J2.12 | length 103.2
  L1 w4: v1(1585,3515) 1585.2,3515.2 1585.2,3566.22 J1.11@1585.39,3566.42
  L4 w4: v1(1585,3515) 1585.39,3515.39 J2.12@1585.39,3566.42
GPIO20: J1.47 J2.48 | length 107.4
  L1 w4: J1.47@1939.72,3566.42 1939.72,3619.72 v1(1940,3620)
  L4 w4: J2.48@1939.72,3566.42 1939.86,3566.56 1939.86,3619.86 v1(1940,3620)
GPIO21: J1.49 J2.50 | length 137.7
  L1 w4: J1.49@1959.41,3566.42 1959.41,3634.41 v1(1960,3635)
  L4 w4: J2.50@1959.41,3566.42 1959.7,3566.71 1959.7,3634.7 v1(1960,3635)
GPIO22: J1.51 J2.52 | length 97.9
  L1 w4: J1.51@1979.09,3566.42 1979.09,3614.09 v1(1980,3615)
  L4 w4: J2.52@1979.09,3566.42 1979.55,3566.87 1979.55,3614.55 v1(1980,3615)
GPIO23: J1.57 J2.58 | length 108.7
  L1 w4: J1.57@2038.15,3566.42 2038.15,3618.15 v1(2040,3620)
  L4 w4: J2.58@2038.15,3566.42 2039.07,3567.34 2039.07,3619.07 v1(2040,3620)
GPIO24: J1.59 J2.60 | length 149
  L1 w4: J1.59@2057.83,3566.42 2057.83,3637.83 v1(2060,3640)
  L4 w4: J2.60@2057.83,3566.42 2058.92,3567.5 2058.92,3638.92 v1(2060,3640)
GPIO25: J1.61 J2.62 | length 108.5
  L1 w4: J1.61@2077.52,3566.42 2077.52,3617.23 2079.14,3618.85 v1(2079.14,3620)
  L4 w4: J2.62@2077.52,3566.42 2078.33,3567.23 2078.33,3619.19 v1(2079.14,3620)
GPIO26: J1.63 J2.64 | length 149
  L1 w4: v1(2095,3640) 2097.2,3637.8 J1.63@2097.2,3566.42
  L4 w4: v1(2095,3640) 2096.1,3638.9 2096.1,3567.52 J2.64@2097.2,3566.42
GPIO31: J1.75 J2.76 | length 107.4
  L1 w4: v1(2215,3620) 2215.32,3619.68 J1.75@2215.32,3566.42
  L4 w4: v1(2215,3620) 2215.16,3619.84 2215.16,3566.57 J2.76@2215.32,3566.42
GPIO35: J1.83 J2.84 | length 107.9
  L1 w4: J1.83@2294.06,3566.42 2294.06,3619.06 v1(2295,3620)
  L4 w4: J2.84@2294.06,3566.42 2294.53,3566.89 2294.53,3619.53 v1(2295,3620)
GPIO36: J1.85 J2.86 | length 138.2
  L1 w4: J1.85@2313.74,3566.42 2313.74,3633.74 v1(2315,3635)
  L4 w4: J2.86@2313.74,3566.42 2314.37,3567.05 2314.37,3634.37 v1(2315,3635)
GPIO37: J1.87 J2.88 | length 108.5
  L1 w4: J1.87@2333.43,3566.42 2333.43,3618.43 v1(2335,3620)
  L4 w4: J2.88@2333.43,3566.42 2334.21,3567.2 2334.21,3619.21 v1(2335,3620)
GPIO38: J1.89 J2.90 | length 138.7
  L1 w4: J1.89@2353.11,3566.42 2353.11,3633.11 v1(2355,3635)
  L4 w4: J2.90@2353.11,3566.42 2354.06,3567.36 2354.06,3634.06 v1(2355,3635)
GPIO39: J1.91 J2.92 | length 109
  L1 w4: J1.91@2372.8,3566.42 2372.8,3617.8 v1(2375,3620)
  L4 w4: J2.92@2372.8,3566.42 2373.9,3567.52 2373.9,3618.9 v1(2375,3620)
GPIO40: J1.93 J2.94 | length 139.3
  L1 w4: J1.93@2392.48,3566.42 2392.48,3632.48 v1(2395,3635)
  L4 w4: J2.94@2392.48,3566.42 2393.74,3567.68 2393.74,3633.74 v1(2395,3635)
GPIO44: J1.66 J2.65 | length 143.1
  L1 w4: v1(2115,3350) 2115.94,3350.94 2115.94,3419.8 J1.66@2116.89,3420.75
  L4 w4: v1(2115,3350) 2116.89,3351.89 J2.65@2116.89,3420.75
GPIO45: J1.68 J2.67 | length 112.8
  L1 w4: v1(2135,3365) 2135,3370 2136.57,3371.57 J1.68@2136.57,3420.75
  L4 w4: v1(2135,3365) 2135.79,3365.79 2135.79,3419.96 J2.67@2136.57,3420.75
GPIO46: J1.70 J2.69 | length 142.5
  L1 w4: v1(2155,3350) 2155.63,3350.63 2155.63,3420.12 J1.70@2156.26,3420.75
  L4 w4: v1(2155,3350) 2156.26,3351.26 J2.69@2156.26,3420.75
GPIO47: J1.72 J2.71 | length 112.3
  L1 w4: v1(2175,3365) 2175.94,3365.94 J1.72@2175.94,3420.75
  L4 w4: v1(2175,3365) 2175.47,3365.47 2175.47,3420.28 J2.71@2175.94,3420.75
H: J3.21 J4.22 K37.4 K38.4 | length 4318.3
  L1 w11.55: J3.21@1683.82,310.51 1683.82,364.95 v1(1683.87,365) 1683.87,478.87 1785,580 2490,580 2550,640 3330,640 3405,715 3405,1470 3490,1555 3490,2000 3600,2110 3600,2485 3647.68,2532.68 K37.4@3647.68,2630 3648.84,2631.16 3648.84,2888.84 K38.4@3650,2890
  L4 w11.55: J4.22@1683.82,310.51 v1@1683.84,364.97
I: J3.23 J4.24 K35.4 K36.4 | length 3903.2
  L1 w11.55: J3.23@1703.5,310.51 v1(1703.5,385) 1703.5,458.5 1800,555 2525,555 2575,605 3415,605 3475,665 3475,950 3490,965 3490,1440 3600,1550 3600,2055 3645,2100 K35.4@3645,2185 3645,2194.13 3665,2214.13 K36.4@3665,2410
  L4 w11.55: J4.24@1703.5,310.51 v1(1703.5,385)
J: J3.25 J4.26 K33.4 K34.4 | length 3450.1
  L1 w11.55: J3.25@1723.19,310.51 1723.19,361.81 1723.14,361.86 v1(1723.14,365) 1723.14,438.14 1810,525 2550,525 2595,570 3545,570 3600,625 3600,1450 3645,1495 K33.4@3645,1655 K34.4@3645,1920
  L4 w11.55: J4.26@1723.19,310.51 v1@1723.16,364.97
K: J3.27 J4.28 K31.4 K32.4 | length 2968.8
  L1 w11.55: v1@1740.75,385 1742.87,382.87 J3.27@1742.87,310.51 ; v1(1742.77,385) 1740.75,387.02 1740.75,415.75 1820,495 2585,495 2630,540 3605,540 3645,580 K31.4@3645,1135 K32.4@3645,1395
  L4 w11.55: v1(1742.77,385) 1742.87,384.9 J4.28@1742.87,310.51
L: J3.29 J4.30 K29.4 K30.4 | length 2017.4
  L1 w11.55: J3.29@1762.56,310.51 1762.56,364.95 v1(1762.51,365) 1762.51,402.51 1825,465 2550,465 2680,335 3150,335 3192.64,292.36 K29.4@3267.6,292.36 3268.78,291.18 3533.82,291.18 K30.4@3535,290
  L4 w11.55: J4.30@1762.53,310.54 v1(1762.51,365)